# Altium PCB DPpcb_Prepared.PcbDoc
Units mm, origin at the board's own origin, x right, y up, seen from the top; angles counter-clockwise.
Board outline 142.21 x 72.14 mm, 4 copper layers (Top Layer, GND-S Layer, GND-P Layer, Bottom Layer), stack 0.603 mm thick; 62 components, 27 nets, 211 pads, 31 vias.
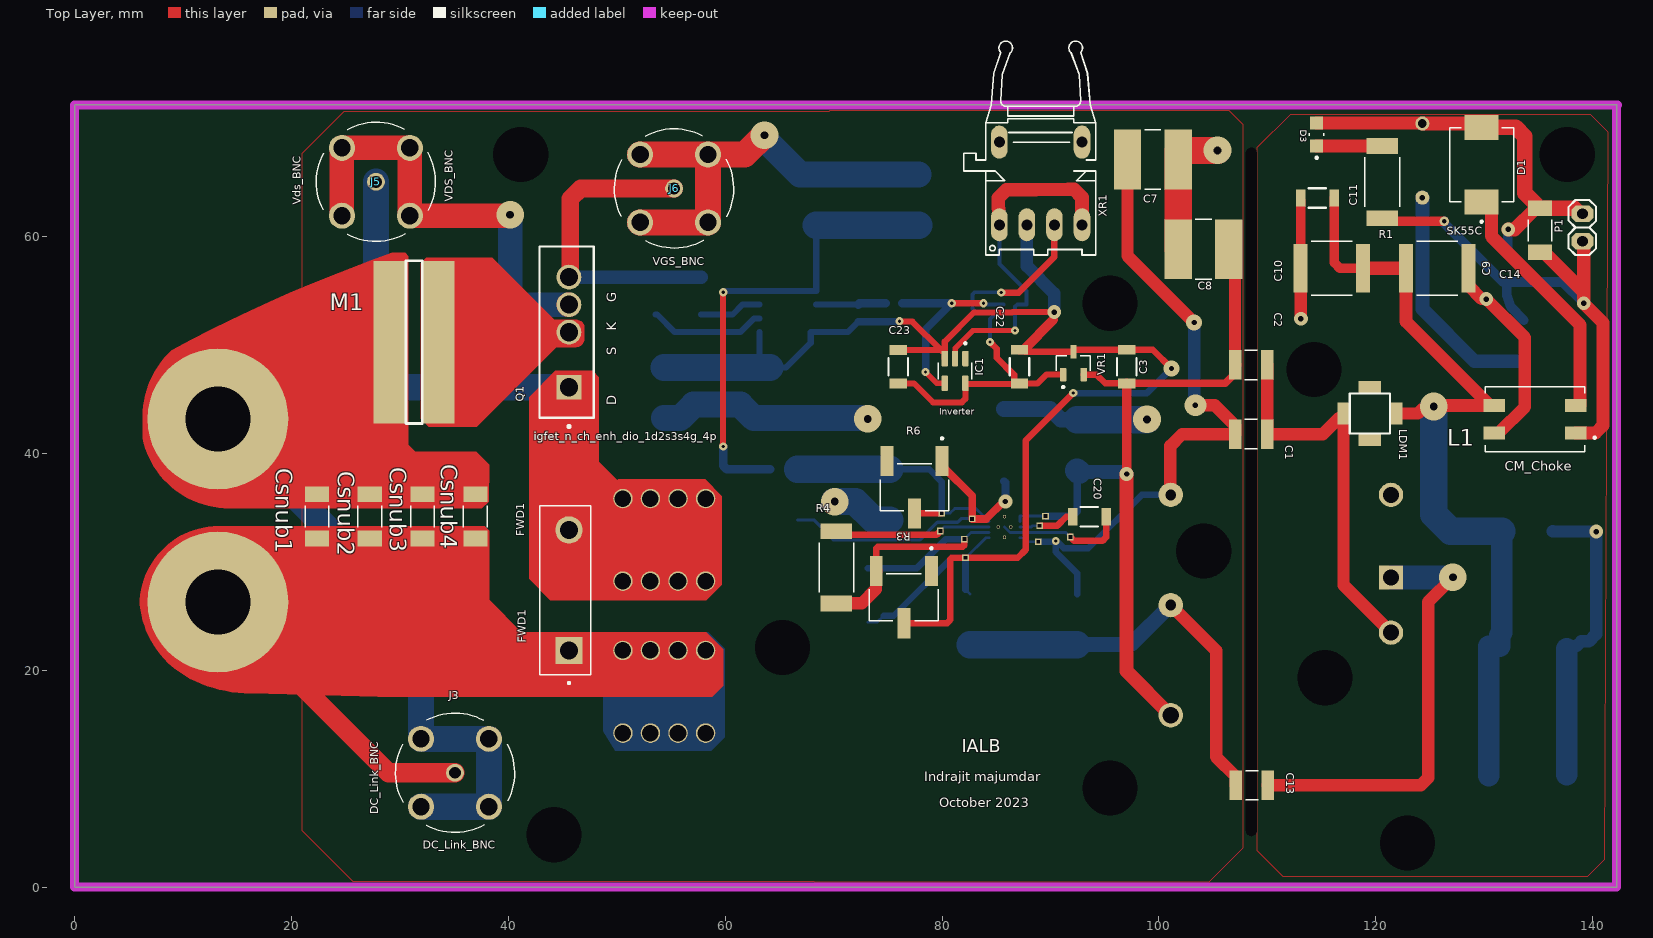
[diagram p0: Top Layer view]
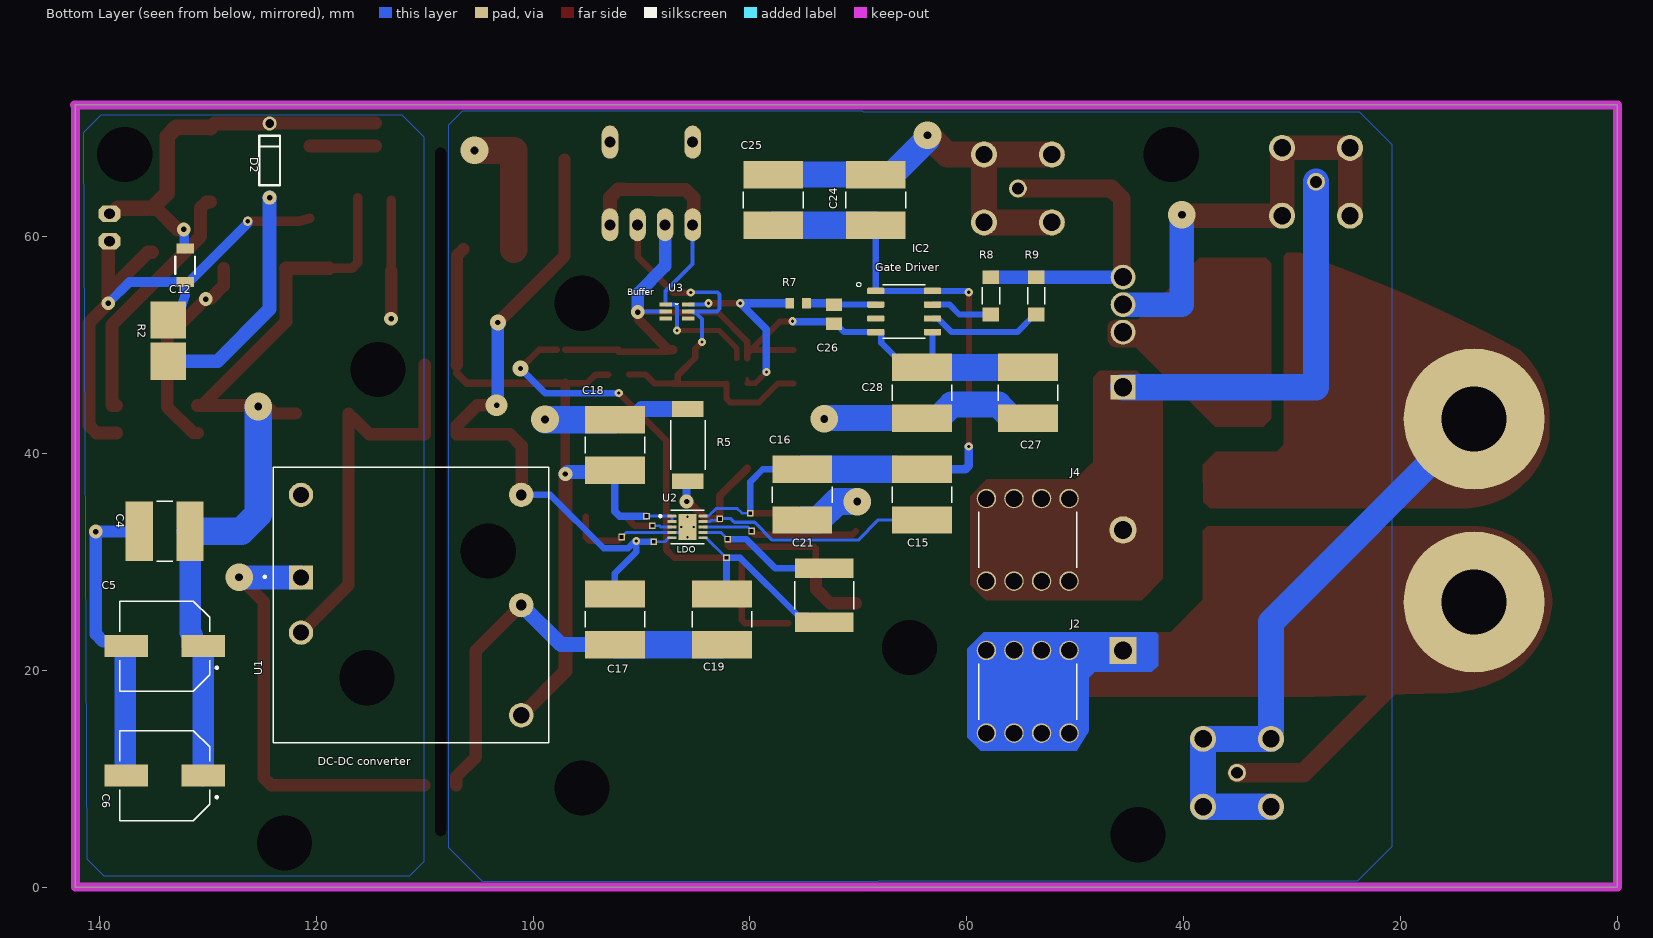
[diagram p1: Bottom Layer view, seen from below]
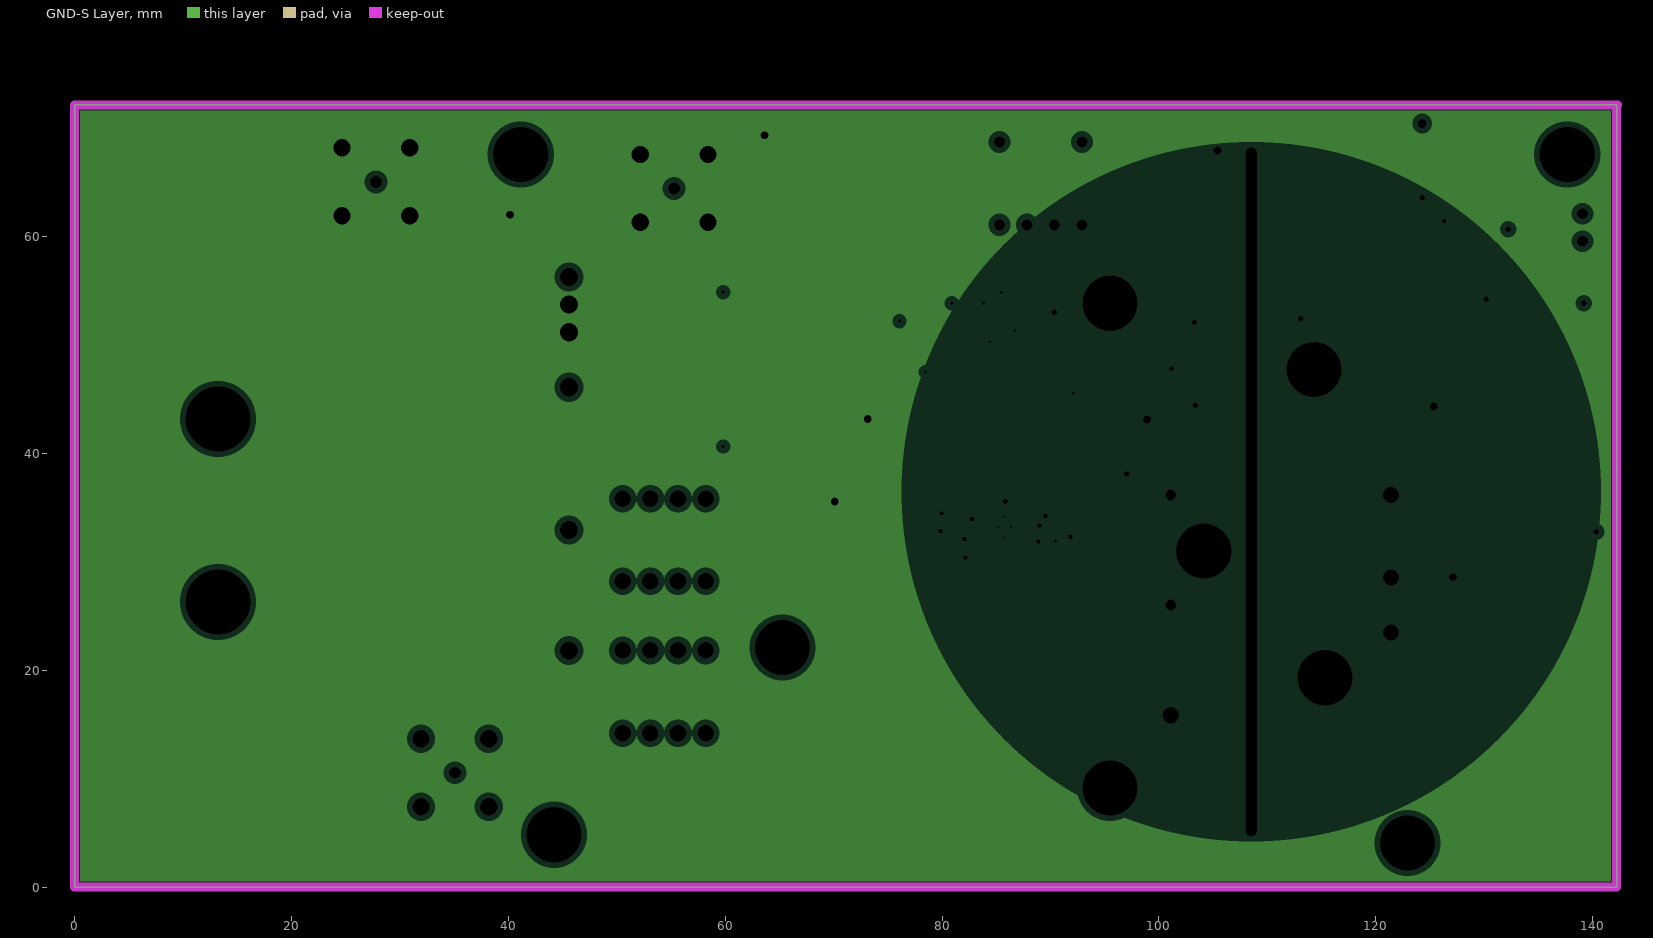
[diagram p2: GND-S Layer, clearances drawn from the general rule]
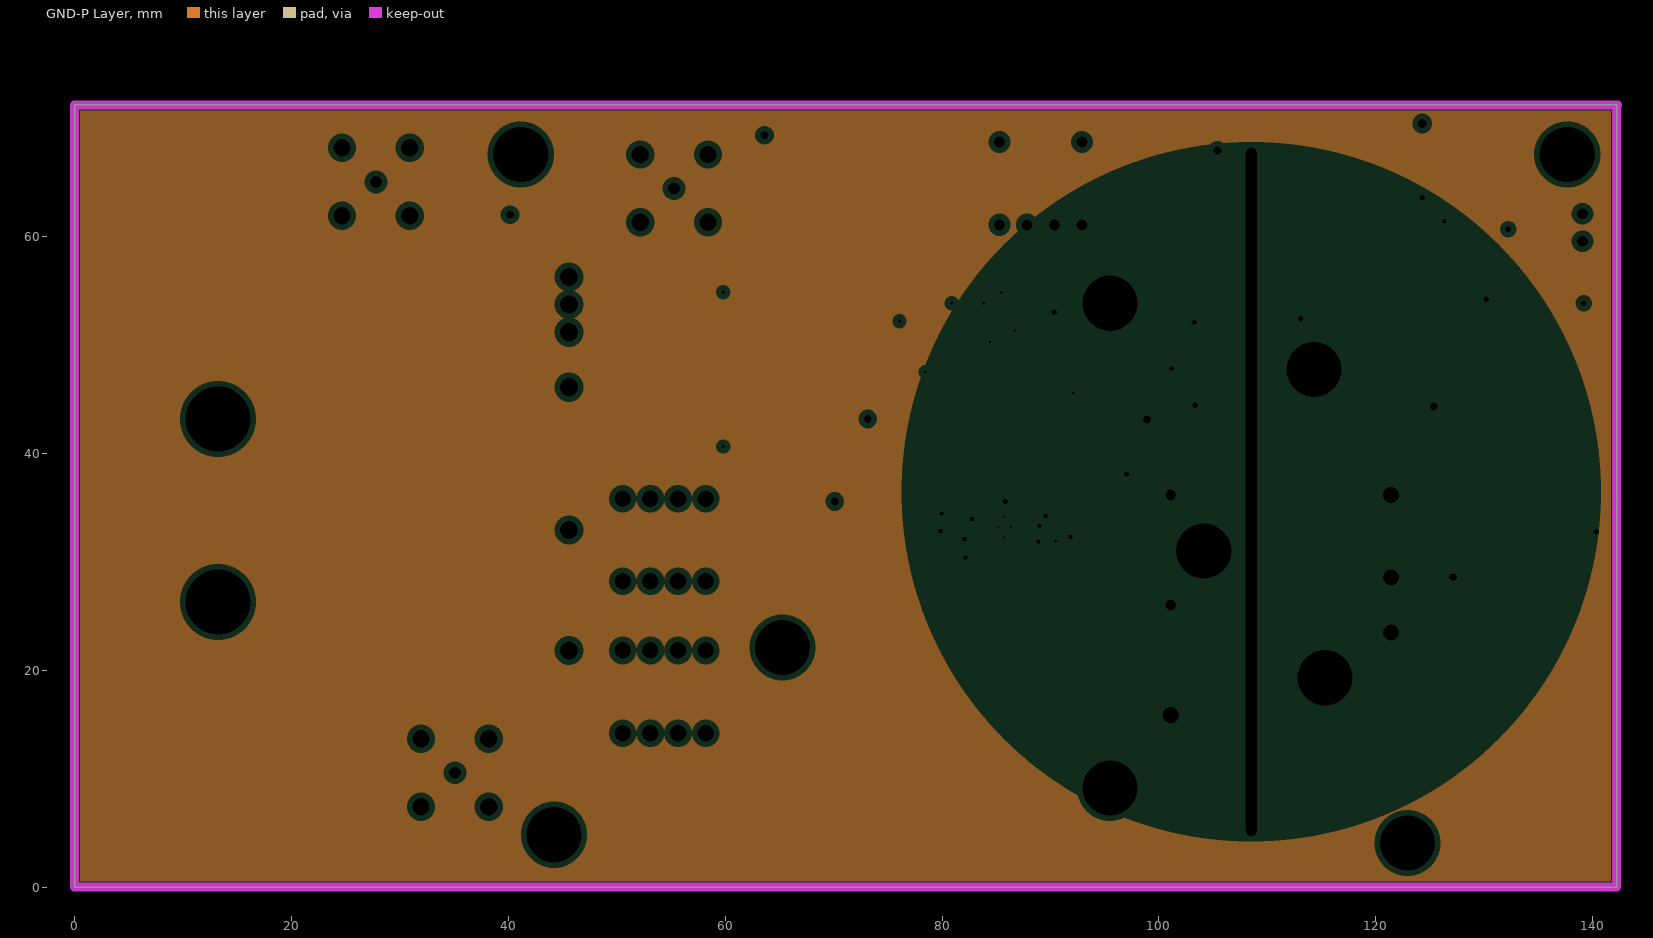
[diagram p3: GND-P Layer, clearances drawn from the general rule]

## Layer stack, top to bottom
Top Solder: solder mask 0.0102, Solder Resist, Dk 3.5
Top Layer: signal copper 0.0356
Dielectric 2: prepreg 0.0711, PP-006, Dk 4.1
GND-S Layer: plane copper 0.035, net GND-S
Dielectric 1: dielectric 0.32, FR-4, Dk 4.8
GND-P Layer: plane copper 0.035, net GND-P
Dielectric 3: prepreg 0.0711, PP-006, Dk 4.1
Bottom Layer: signal copper 0.0356
Bottom Solder: solder mask 0.0102, Solder Resist, Dk 3.5

## Board outline
0,0 0,72.136 142.215,72.136 142.215,0

## Design rules (kind name [scope] priority, off if disabled: settings)
Clearance [All] p1: gap=0.15 ignorepadtopadclearanceinfootprint=FALSE
HoleSize [All] p1: absolutevalues=TRUE maxlimit=76.2 minlimit=0.18 maxpercent=80.000 minpercent=20.000
MinimumSolderMaskSliver [All] p1: minsoldermaskwidth=0.025
PlaneClearance [All] p1: clearance=0.508
PlaneConnect [All] p1: planeconnectstyle=Direct reliefexpansion=0.508 reliefentries=4 reliefconductorwidth=0.254 reliefairgap=0.254
PolygonConnect [All] p1: connectstyle=Direct reliefconductorwidth=0.254 reliefentries=4 polygonreliefangle="90 Angle" airgapwidth=0.254
RoutingVias [All] p1: holewidth=0.711 width=1.27 viastyle="Through Hole" minholewidth=0.254 minwidth=0.203 maxholewidth=11 maxwidth=12
SilkToSilkClearance [All] p1: silktosilkclearance=0.127
SilkToSolderMaskClearance [IsPad] p1: minsilkscreentomaskgap=0.025 clearancetoexposedcopper=TRUE
SolderMaskExpansion [All] p1: expansion=0.102 istentingtop=FALSE
Width [All] p1: maxlimit=3.81 minlimit=0.254 preferedwidth=0.254
24 further rules are at their usual default settings.

## Classes and differential pairs
net class Csnub4_Nets: Supply+ Supply-
net class Csnub3_Nets: Supply+ Supply-
net class Csnub2_Nets: Supply+ Supply-
net class Csnub1_Nets: Supply+ Supply-
net class M1_Nets: GND-S NetM1_1 NetM1_2 Supply-
net class D3_Nets: +24V-IN NetD3_C
net class L1_Nets: +24V-P GND GND-P NetD1_C
net class XR1_Nets: -VEE(2-22V)-S NetC22_2 PWM-S1
net class VR1_Nets: +24V-S -VEE(2-22V)-S NetC22_2
net class U3_Nets: -VEE(2-22V)-S NetC22_2 NetU3_3 NetU3_4 PWM-S1 PWM-S2
net class R9_Nets: GATE NetIC2_6
net class R8_Nets: GATE NetIC2_7
net class R7_Nets: NetC26_2 PWM-S2
net class Q1_Nets: "FWD A" GATE GND-S
net class J6_Nets: GATE GND-S
net class J5_Nets: "FWD A" GND-S
net class J4_Nets: "FWD A"
net class J3_Nets: Supply+ Supply-
net class J2_Nets: Supply+
net class IC2_Nets: +VCC(2-22V)-S -VEE(2-22V)-S NetC26_2 NetIC2_3 NetIC2_6 NetIC2_7
net class IC1_Nets: -VEE(2-22V)-S NetC22_2 NetIC1_1 PWM-S1 PWM-S2
net class FWD1_Nets: "FWD A" Supply+
net class C28_Nets: -VEE(2-22V)-S GND-S
net class C27_Nets: -VEE(2-22V)-S GND-S
net class C26_Nets: -VEE(2-22V)-S NetC26_2
net class C25_Nets: +VCC(2-22V)-S GND-S
net class C24_Nets: +VCC(2-22V)-S GND-S
net class C23_Nets: -VEE(2-22V)-S NetC22_2
net class C22_Nets: -VEE(2-22V)-S NetC22_2
component class DP_PWM: C3 C22 C23 C24 C25 C26 C27 C28 Csnub1 Csnub2 Csnub3 Csnub4 FWD1 IC1 IC2 J2 J3 J4 J5 J6 Q1 R7 R8 R9 U3 VR1 XR1
net class U2_Nets: +24V-S +VCC(2-22V)-S -24V-S -VEE(2-22V)-S FBN GND-S NetC15_2 NetC20_2 NetR4_2
net class U1_Nets: +24V-S -24V-S GND-P GND-S NetC1_1 NetU1_6
net class R6_Nets: +VCC(2-22V)-S NetC15_2 NetR6_2
net class R5_Nets: GND-S NetC15_2
net class R4_Nets: FBN NetR4_2
net class R3_Nets: -VEE(2-22V)-S FBN NetR3_2
net class R2_Nets: GND NetD2_1
net class R1_Nets: GND NetD3_C
net class LDM1_Nets: +24V-P NetC1_1 NetLDM1_2 NetLDM1_4
net class P1_Nets: +24V-IN GND
net class D2_Nets: +24V-IN NetD2_1
net class D1_Nets: +24V-IN NetD1_C
net class C21_Nets: -VEE(2-22V)-S FBN
net class C20_Nets: GND-S NetC20_2
net class C19_Nets: -VEE(2-22V)-S GND-S
net class C18_Nets: +24V-S GND-S
net class C17_Nets: -24V-S GND-S
net class C16_Nets: +VCC(2-22V)-S GND-S
net class C15_Nets: +VCC(2-22V)-S NetC15_2
net class C14_Nets: +24V-IN GND
net class C13_Nets: GND-P GND-S
net class C12_Nets: +24V-IN GND
net class C11_Nets: +24V-P GND-P
net class C10_Nets: +24V-P GND-P
net class C9_Nets: +24V-P GND-P
net class C8_Nets: +24V-S GND-S
net class C7_Nets: -24V-S GND-S
net class C6_Nets: +24V-P GND-P
net class C5_Nets: +24V-P GND-P
net class C4_Nets: +24V-P GND-P
net class C3_Nets: +24V-S -VEE(2-22V)-S
net class C2_Nets: +24V-S NetC1_1
net class C1_Nets: -24V-S NetC1_1
component class MainSchematic: C1 C2 C4 C5 C6 C7 C8 C9 C10 C11 C12 C13 C14 C15 C16 C17 C18 C19 C20 C21 D1 D2 D3 L1 LDM1 P1 R1 R2 R3 R4 R5 R6 U1 U2

## Components (designator, comment, footprint, x,y, rotation, side; value= is the part's Value field where it differs from the comment)
C1 "C1210C102KGRACTU" CAPC3225X155N 108.509,41.783 r180 top value=1000pF
C2 "C1210C102KGRACTU" CAPC3225X155N 108.509,48.158 r180 top value=1000pF
C3 "885382208003" WCAP-CSST_885382208003 97.028,48.006 r270 top value=100nF
C4 "CKG57KX7S1H106K335JJ" CAPC6050X350N 133.985,32.817 r0 bottom value=10µF
C5 "EEEFN1H101L" CAP_EEEFN1H101L 133.985,22.23 r0 bottom value=100µF
C6 "EEEFN1H101L" CAP_EEEFN1H101L 133.985,10.287 r0 bottom value=100µF
C7 "CKG57KX7S1H106K335JJ" CAPC6050X350N 99.443,67.107 r0 top value=10µF
C8 "CKG57KX7S1H106K335JJ" CAPC6050X350N 104.115,58.826 r180 top value=10µF
C9 "C5750X7R1V476M230KC" CAP_C5750X7R1V476M230KC 125.679,57.074 r0 top value=47µF
C10 "C5750X7R1V476M230KC" CAP_C5750X7R1V476M230KC 115.951,57.074 r180 top value=47µF
C11 "885382208003" WCAP-CSST_885382208003 114.629,63.551 r0 top value=100nF
C12 "885382208003" WCAP-CSST_885382208003 132.105,57.353 r90 bottom value=100nF
C13 "C1210C102KGRACTU" CAPC3225X155N 108.585,9.398 r180 top value=1000pF
C14 "GA342QR7GF101KW01L" CAPC4520X150N 135.151,60.579 r270 top value=100pF
C15 "CKG57KX7S1H106K335JJ" CAPC6050X350N 64.135,36.195 r270 bottom value=10µF
C16 "CKG57KX7S1H106K335JJ" CAPC6050X350N 75.184,36.195 r270 bottom value=10µF
C17 "CKG57KX7S1H106K335JJ" CAPC6050X350N 92.456,24.694 r270 bottom value=10µF
C18 "CKG57KX7S1H106K335JJ" CAPC6050X350N 92.456,40.767 r90 bottom value=10µF
C19 "CKG57KX7S1H106K335JJ" CAPC6050X350N 82.575,24.694 r270 bottom value=10µF
C20 "885382208003" WCAP-CSST_885382208003 93.599,34.163 r180 top value=100nF
C21 "GR455DR73D103KW01L" CAPC5750X200N 73.152,26.924 r90 bottom value=10nF
C22 "885382208003" WCAP-CSST_885382208003 87.147,48.006 r270 top value=100nF
C23 "885382208003" WCAP-CSST_885382208003 75.971,47.995 r270 top value=100nF
C24 "CKG57KX7S1H106K335JJ" CAPC6050X350N 68.401,63.373 r90 bottom value=10µF
C25 "CKG57KX7S1H106K335JJ" CAPC6050X350N 77.851,63.373 r90 bottom value=10µF
C26 "C0805C330J5GACTU" CAPC2012X88N 72.263,52.846 r90 bottom value="33 pF"
C27 "CKG57KX7S1H106K335JJ" CAPC6050X350N 54.356,45.593 r270 bottom value=10µF
C28 "CKG57KX7S1H106K335JJ" CAPC6050X350N 64.135,45.593 r270 bottom value=10µF
Csnub1 "GA342QR7GF101KW01L" CAPC4520X150N 22.352,34.188 r90 top value=100pF
Csnub2 "GA342QR7GF101KW01L" CAPC4520X150N 27.22,34.188 r90 top value=100pF
Csnub3 "GA342QR7GF101KW01L" CAPC4520X150N 32.089,34.188 r90 top value=100pF
Csnub4 "GA342QR7GF101KW01L" CAPC4520X150N 36.957,34.188 r90 top value=100pF
D1 "SK55C" DIOM6859X262N 129.769,66.624 r90 top
D2 "BZX79C3V6" FAIR-DO-35-2 124.308,67.011 r90 bottom
D3 "Q62702P5179" LED_Q62702P5179 114.554,69.418 r90 top
FWD1 "Silicon Carbide (SiC) Schottky Diodes" DIO_FFH30S60STU 45.593,27.381 r90 top
IC1 "Single Inverter" SOT95P275X120-5N 81.204,47.601 r270 top
IC2 "Gate Driver" SOIC127P600X134-8N 65.786,53.086 r180 bottom
J2 "7460305" WE_7460305 54.381,18.011 r180 bottom
J3 "DC_Link_BNC" TE_5-1634503-1 35.077,10.541 r0 top
J4 "7460305" WE_7460305 54.381,32.025 r180 bottom
J5 "Vds_BNC" TE_5-1634503-1 27.788,65.049 r90 top
J6 "Vgs_BNC" TE_5-1634503-1 55.29,64.434 r90 top
L1 "SRF0905-100Y" IND_SRF0905-100Y 134.696,43.155 r180 top
LDM1 "SRU5028 Series - Shielded SMD Power Inductors" "Shielded SMD Power Inductors" 119.456,41.834 r90 top
M1 "M-Shunt" M-shu 32.058,57.767 r180 top
P1 "Header 2" My_1X02 139.065,59.563 r270 top
Q1 "igfet_n_ch_enh_dio_1d2s3s4g_4p" INF-PG-TO247-4-1 45.593,51.181 r90 top
R1 "ERJS1TJ103U" RES_ERJS1TJ103U 120.599,65.024 r90 top value=10k
R2 "RCP2512W1K00JEB" RESC6331X64N 133.655,50.394 r270 bottom value=1k
R3 "3269W-1-104GLF" TRIM_3269W-1-104GLF 76.479,26.746 r270 top
R4 "ERJS1TJ103U" RES_ERJS1TJ103U 70.256,29.489 r90 top value=10k
R5 "ERJS1TJ103U" RES_ERJS1TJ103U 85.725,40.767 r270 bottom value=10k
R6 "3269W-1-104GLF" TRIM_3269W-1-104GLF 77.47,36.881 r270 top
R7 "MCT0603MD1000BP100" RESC1508X55N 75.565,53.848 r180 bottom value=100Ω
R8 "ERJ8BQJ1R0V" RES_ERJ8BQJ1R0V 57.785,54.536 r90 bottom value=2Ω
R9 "ERJ8BQJ1R0V" RES_ERJ8BQJ1R0V 53.594,54.536 r90 bottom value="2 Ω"
U1 "PDQE10-Q24-D24-D" CONV_PDQE10-Q24-D24-D 111.252,26.01 r90 bottom
U2 "TPS7A3901DSCT" SON50P300X300X80-11N 85.767,33.213 r180 bottom
U3 "NC7WZ17P6X" SOT65P210X110-6N 86.741,53.086 r180 bottom
VR1 "TLV76050DBZT" SOT95P237X112-3N 92.126,48.318 r90 top
XR1 "HFBR-2521" HFBR-15X3 89.103,70.612 r180 top

## Footprints (in the part's own frame and the unit in brackets; to place one, negate y for a bottom-side part, rotate by r counter-clockwise, add the part's x,y. Pads: shape width x height; smd on the part's side, far side on the other; paste and mask are expansions set on the pad)
CAP_C5750X7R1V476M230KC [mm]
  rect 1.3x4.5 smd: 1(-2.875,0) 2(2.875,0)
  silkscreen extent -1.91,-2.5 1.91,2.5
CAP_EEEFN1H101L [mm]
  rect 4x2 smd: 1(-3.55,0) 2(3.55,0)
  silkscreen extent -4.9,-4.15 4.15,4.15, body extent -4.85,-4.15 4.85,4.15, height 10.2
CAPC2012X88N [mm]
  rect 1.16x1.47 smd: 1(-0.875,0) 2(0.875,0)
CAPC3225X155N [mm]
  rect 1.16x2.72 smd: 1(-1.475,0) 2(1.475,0)
  silkscreen extent -0.57,-1.35 0.57,1.35
CAPC4520X150N [mm]
  rect 1.45x2.22 smd: 1(-2.032,0) 2(2.032,0)
  silkscreen extent -0.99,-1.1 0.99,1.1
CAPC5750X200N [mm]
  rect 1.8x5.41 smd: 1(-2.503,0) 2(2.503,0)
  silkscreen extent -1.28,-2.7 1.28,2.7, body extent -2.85,-2.5 2.85,2.5, height 2
CAPC6050X350N [mm]
  rect 2.53x5.51 smd: 1(-2.336,0) 2(2.336,0)
  silkscreen extent -0.75,-2.75 0.75,2.75, body extent -3,-2.5 3,2.5, height 3.5
CONV_PDQE10-Q24-D24-D [mm]
  rect 2.25x2.25 hole 1.5: 1(2.54,10.16)
  round 2.25 hole 1.5: 2(-2.54,10.16) 3(-10.16,-10.16) 6(10.16,10.16)
  round 2.25 hole 1: 4(0,-10.16) 5(10.16,-10.16)
  silkscreen extent -12.7,-12.7 12.7,13.6
DIO_FFH30S60STU [mm]
  rect 2.52x2.52 / inner round 2.52 / far side rect 2.52x2.52 hole 1.68: 1(-5.56,0)
  round 2.52 hole 1.68: 2(5.56,0)
  silkscreen extent -8.66,-1.99 7.81,2.71, body extent -7.81,-1.99 7.81,2.71, height 24.75
DIOM6859X262N [mm]
  rect 2.29x3.12 smd: A(3.43,0) C(-3.43,0)
  silkscreen extent -5.35,-2.95 3.43,2.95
FAIR-DO-35-2 [mm] "TH, 2-Leads, Dia 1.91mm"
  round 1.3 hole 0.5: 1(-3.42,0)
  round 1.3 hole 0.8: 2(3.42,0)
  silkscreen extent -2.28,-0.95 2.28,0.95, body extent -3.7,-0.96 3.7,0.95, height 1.9
HFBR-15X3 [mil]
  oval 60x120 hole 40: 1(150,375) 2(50,375) 3(-50,375) 4(-150,375) 5(-150,75) 8(150,75)
  silkscreen extent -200,-292 280,485
IND_SRF0905-100Y [mm]
  rect 2x1.2 smd: 1(-3.75,1.27) 2(-3.75,-1.27) 3(3.75,-1.27) 4(3.75,1.27)
  silkscreen extent -5.6,-3 4.6,3
INF-PG-TO247-4-1 [mm] "TO247, 2.54mm pitch;4 pin, 15.8mm L X 5mm W X 25.22mm H body"
  rect 2.28x2.28 hole 1.68 paste-2539.97 mask+0: 1(-5.08,0)
  round 2.28 hole 1.68 paste-2539.97 mask+0: 2(0,0) 3(2.54,0) 4(5.08,0)
  silkscreen extent -8.82,-2.29 7.9,2.71, body extent -7.9,-2.3 7.9,2.71, height 25.12
LED_Q62702P5179 [mm]
  rect 1.2x1.2 smd: A(1.05,0) C(-1.05,0)
  silkscreen extent -2.25,-0.67 0.13,0.67, body extent -1,-0.65 1,0.65, height 0.8
M-shu [mm] "Connected to source to Source-"
  rect 3x15 smd: 1(-1.499,7.5) 2(3,7.5)
  silkscreen extent 0,0 1.5,15
My_1X02 [mil]
  oct 60x80 hole 39.37: 1(-100,0) 2(0,0)
  silkscreen extent -150,-50 50,50, body extent -150,-51 46,47, height 323
RES_ERJ8BQJ1R0V [mm]
  rect 1.25x1.5 smd: 1(-1.725,0) 2(1.725,0)
  silkscreen extent -0.78,-0.8 0.78,0.8
RES_ERJS1TJ103U [mm]
  rect 1.45x2.9 smd: 1(-3.325,0) 2(3.325,0)
  silkscreen extent -2.28,-1.6 2.28,1.6
RESC1508X55N [mm]
  rect 0.81x0.98 smd: 1(-0.771,0) 2(0.771,0)
RESC6331X64N [mm]
  rect 3.42x3.3 smd: 1(-1.894,0) 2(1.894,0)
"Shielded SMD Power Inductors" [mm]
  rect 2.05x1.15 smd: 1(1.85,-2.425) 3(1.85,2.425)
  rect 1.15x2.05 smd: 2(4.275,0) 4(-0.575,0)
  silkscreen extent 0,-1.85 3.7,1.85
SOIC127P600X134-8N [mm]
  rrect25% 1.57x0.58 smd: 1(-2.615,1.905) 2(-2.615,0.635) 3(-2.615,-0.635) 4(-2.615,-1.905) 5(2.615,-1.905) 6(2.615,-0.635) 7(2.615,0.635) 8(2.615,1.905)
  silkscreen extent -4.39,-2.46 1.97,2.68
SON50P300X300X80-11N [mm]
  rrect50% 0.86x0.26 smd: 1(-1.435,1) 2(-1.435,0.5) 3(-1.435,0) 4(-1.435,-0.5) 5(-1.435,-1) 6(1.435,-1) 7(1.435,-0.5) 8(1.435,0) 9(1.435,0.5) 10(1.435,1)
  rect 1.65x2.4 smd paste-2: 11(0,0)
  round 0.3 hole 0.2: 11_1(0,0.95) 11_2(-0.575,0) 11_3(0.575,0) 11_4(0,-0.95)
  silkscreen extent -2.6,-1.55 1.55,1.55
SOT65P210X110-6N [mil]
  rect 46x14 smd: 1(-41,26) 2(-41,0) 3(-41,-26) 4(41,-26) 5(41,0) 6(41,26)
  silkscreen extent -5,27 5,28
SOT95P237X112-3N [mm]
  rrect25% 1.24x0.59 smd: 1(-1.055,0.95) 2(-1.055,-0.95) 3(1.055,0)
  silkscreen extent -2.3,-1.57 0.7,1.57
SOT95P275X120-5N [mm]
  rrect25% 1.42x0.58 smd: 1(-1.145,0.95) 2(-1.145,0) 3(-1.145,-0.95) 4(1.145,-0.95) 5(1.145,0.95)
  silkscreen extent -2.64,-1.56 0.75,1.56, body extent -1.34,-1.5 1.41,1.5, height 1.1
TE_5-1634503-1 [mm]
  round 1.65 hole 1.1: 1(0,0)
  round 2.4 hole 1.6: 2(-3.13,3.13) 3(3.13,3.13) 4(3.13,-3.13) 5(-3.13,-3.13)
  silkscreen extent -5.49,-5.49 5.5,5.51
TRIM_3269W-1-104GLF [mm]
  rect 2.79x1.19 smd: 1(-2.415,2.54) 2(2.415,0) 3(-2.415,-2.54)
  silkscreen extent -4.6,-3.17 2.16,3.18, body extent -3.18,-3.18 3.18,3.18, height 8.46
WCAP-CSST_885382208003 [mm]
  rect 0.9x1.6 smd: 1(-1.55,0) 2(1.55,0)
  silkscreen extent -0.8,-0.9 0.8,0.9, body extent -1.6,-0.8 1.6,0.8, height 0.63
WE_7460305 [mm]
  round 1.8 hole 1.525: 1(-3.81,3.81) 2(-1.27,3.81) 3(1.27,3.81) 4(3.81,3.81) 5(3.81,-3.81) 6(1.27,-3.81) 7(-1.27,-3.81) 8(-3.81,-3.81)
  silkscreen extent -4.5,-2.59 4.5,2.59

## Part data
C1 C2 C13: "Capacitor;Ceramic;Cap;1000pF;Tol+10%;SMT;Vol-Rtg 2000V;High Voltage;TR", Package=None, Availability=Unavailable, MP=C1210C102KGRACTU, Price=None
C3 C11 C12 C20 C22 C23: "WCAP-CSST Soft Termination MLCC; SMT 1206; X7R; 100nF 10%; 50V; -55C to +125C; Tech. PN X7R1206104K050DFCT1S000", Package="1206 Wurth Electronics", Availability=Warning, Check_prices=https://www.snapeda.com/parts/885382208003/Wurth%20Electronics%20Inc/view-part/4217540/?ref=eda, MF="Wurth Electronics Inc", MP=885382208003, Price=None, SnapEDA_Link=https://www.snapeda.com/parts/885382208003/Wurth%20Electronics%20Inc/view-part/4217540/?ref=snap
C4 C7 C8 C15 C16 C17 C18 C19 C24 C25 C27 C28: "10 ÂµF Â±10% 50V Ceramic Capacitor X7S SMD, J-Lead", Package="6050 TDK", Check_prices=https://www.snapeda.com/parts/CKG57KX7S1H106K335JJ/TDK/view-part/?ref=eda, Digi-Key_Part_Number=445-10463-2-ND, MF=TDK, MP=CKG57KX7S1H106K335JJ, Purchase-URL=https://pricing.snapeda.com/search/part/CKG57KX7S1H106K335JJ/?ref=eda, SnapEDA_Link=https://www.snapeda.com/parts/CKG57KX7S1H106K335JJ/TDK/view-part/?ref=snap
C5 C6: "CAP ALUM 100UF 20% 50V SMD", Package="RADIAL-2 Panasonic", Availability="In Stock", Check_prices=https://www.snapeda.com/parts/EEE-FN1H101L/Panasonic/view-part/6178263/?ref=eda, MF="Panasonic Electronic Components", MP=EEE-FN1H101L, Price=None, Purchase-URL=https://pricing.snapeda.com/search/part/EEE-FN1H101L/?ref=eda, SnapEDA_Link=https://www.snapeda.com/parts/EEE-FN1H101L/Panasonic/view-part/6178263/?ref=snap
C9 C10: "47 ÂµF Â±20% 35V Ceramic Capacitor X7R 2220 (5750 Metric)", Package=None, Check_prices=https://www.snapeda.com/parts/C5750X7R1V476M230KC/TDK/view-part/?ref=eda, MF="TDK Corporation", MP=C5750X7R1V476M230KC, SnapEDA_Link=https://www.snapeda.com/parts/C5750X7R1V476M230KC/TDK/view-part/?ref=snap
C14 Csnub1 Csnub2 Csnub3 Csnub4: "Cap Ceramic Suppression Y2 100pF 250VAC X7R 10% SMD 1808 125C T/R", Package=None, Availability=Unavailable, MP=GA342QR7GF101KW01L, Price=None
C21: "2220 10 nF 2 kV Â±10% Tolerance X7R SMT Multilayer Ceramic Capacitor", Package="5750 Murata", Availability=Warning, Check_prices=https://www.snapeda.com/parts/GR455DR73D103KW01L/Murata%20Electronics%20North%20America/view-part/78913/?ref=eda, MF="Murata Electronics", MP=GR455DR73D103KW01L, Price=None, Purchase-URL=https://pricing.snapeda.com/search/part/GR455DR73D103KW01L/?ref=eda, SnapEDA_Link=https://www.snapeda.com/parts/GR455DR73D103KW01L/Murata%20Electronics%20North%20America/view-part/78913/?ref=snap
C26: "33pF Â±5% 50V Ceramic Capacitor C0G, NP0 0805 _2012 Metric_", Package="2012 KEMET", Digi-Key_Part_Number=399-1115-1-ND, Digi-Key_Purchase_URL=https://www.digikey.com/product-detail/en/kemet/C0805C330J5GACTU/399-1115-1-ND/411390?utm_source=snapeda&utm_medium=aggregator&utm_campaign=symbol, MF=KEMET, MP=C0805C330J5GACTU, SnapEDA_Link=https://www.snapeda.com/parts/C0805C330J5GACTU/KEMET/view-part/609597/?ref=snap
D1 L1 R1 R2 R4 R5 R7 R8 R9 U1: Package=None, Availability=Unavailable, Price=None
  D1: MP=SK55C
  L1: MF="{'manufacturer': u'Bourns'}", MP=SRF0905-100Y
  R1 R4 R5: MP=ERJS1TJ103U
  R2: MP=RCP2512W1K00JEB
  R7: MP=MCT0603MD1000BP100
  R8 R9: MP=ERJ8BQJ1R0V
  U1: MP=PDQE10-Q24-D24-D
D2: library part CMP-004-00021-2, "Zener Diode, 3.6 V, 5 mA, -65 to 200 degC, 2-Pin DO-35, RoHS, Bulk", Case/Package=DO-35-2, Forward Voltage=1.5V, Manufacturer="Fairchild Semiconductor", Max Operating Temperature=200°C, Min Operating Temperature=-65°C, Package Description="2-Pin Through Hole Diode, Dia 1.72 mm, Body Length 3.805 mm", Package Quantity=1000, Power=500mW, Tolerance=6%, Datasheet URL=https://www.fairchildsemi.com/datasheets/BZ/BZX79C3V6.pdf, Datasheet Version="Rev. C1, 07/2007", Impedance=90Ohm, Manufacturer URL=https://www.fairchildsemi.com/, Mounting Technology=TH, Package Reference=DO-35-2, Package URL=https://www.fairchildsemi.com/package-drawings/DO/DO35A.pdf, Packaging=Bulk, Pins=2, RoHS Compliant=True
D3: "LED Uni-Color Green 572nm 2-Pin SMD T/R", Package="0805 Osram Opto", Check_prices=https://www.snapeda.com/parts/Q62702P5179/Osram+Opto/view-part/?ref=eda, MF="Osram Opto", MP=Q62702P5179, SnapEDA_Link=https://www.snapeda.com/parts/Q62702P5179/Osram+Opto/view-part/?ref=snap
FWD1: library part TO−247−2LD, "Silicon Carbide (SiC) Schottky Diodes use a completely new / technology that provides superior switching performance and higher / reliability compared to Silicon. No reverse recovery current, / temperature independent switching characteristics, and excellent / thermal performance sets Silicon Carbide as the next generation of / power semiconductor. System benefits include highest efficiency, / faster operating frequency, increased power density, reduced EMI, and / reduced system size and cost."
IC1: library part MC74VHC1G05DTT1G, "The MC74VHC1G05 / MC74VHC1GT05 is a single inverter with / open drain output in tiny footprint packages. / The input structures provide protection when voltages up to 5.5 V / are applied, regardless of the supply voltage. This allows the device to / be used to interface 5 V circuits to 3 V circuits. The output structures / also provide protection when VCC = 0 V and when the output voltage / exceeds VCC. These input and output structures help prevent device / destruction caused by supply voltage − input/output voltage mismatch, / battery backup, hot insertion, etc.", ComponentLink1Description="Datasheet Link", ComponentLink1URL=https://www.snapeda.com/parts/MC74VHC1G05DTT1G/ON%20Semiconductor/datasheet/, Design Item ID=MC74VHC1G05DTT1G
IC2: library part IXDI609SIA, "The IXDD609/IXDI609/IXDN609 high-speed gate / drivers are especially well suited for driving the latest / IXYS MOSFETs and IGBTs. The IXD_609 / high-current output can source and sink 9A of peak / current while producing voltage rise and fall times of / less than 25ns. The input is CMOS compatible, and is / virtually immune to latch up. Proprietary circuitry / eliminates cross-conduction and current / “shoot-through.” Low propagation delay and fast, / matched rise and fall times make the IXD_609 family / ideal for high-frequency and high-power applications. / The IXDD609 is configured as a non-inverting driver / with an enable, the IXDN609 is configured as a / non-inverting driver, and the IXDI609 is configured as / an inverting driver. / The IXD_609 family is available in a standard 8-pin / DIP (PI); an 8-pin SOIC (SIA); an 8-pin Power SOIC / with an exposed metal back (SI); an 8-pin DFN (D2); a / 5-pin TO-263 (YI); and a 5-pin TO-220 (CI).", ComponentLink1Description="Datasheet link", ComponentLink1URL=https://www.snapeda.com/parts/IXDI609SIA/IXYS/datasheet/, ID=IXDI609SIA
J2 J4: "8 Pin Screw Terminal, Power Tap M5 Through Hole", Package=None, Availability="In Stock", Check_prices=https://www.snapeda.com/parts/7460305/Wurth+Electronics+Inc./view-part/?ref=eda, MF="Wurth Electronics", MP=7460305, Price=None, Purchase-URL=https://pricing.snapeda.com/search/part/7460305/?ref=eda, SnapEDA_Link=https://www.snapeda.com/parts/7460305/Wurth+Electronics+Inc./view-part/?ref=snap
J3 J5 J6: library part 5-1634503-1, "Rf / Coaxial Connector, Bnc Coaxial, Straight Jack, Solder, 50 Ohm, Brass", Package=None, Availability=Unavailable, EU_RoHS_Compliance=Compliant, MF="TE Connectivity", MP=5-1634503-1, Number_of_Positions=1, Price=None, SnapEDA_Link=https://www.snapeda.com/parts/5-1634503-1/TE%20Connectivity%20AMP%20Connectors/view-part/441267/?ref=snap, TE_purchase_URL=https://www.te.com/usa-en/product-5-1634503-1.html?te_bu=Cor&te_type=disp&te_campaign=seda_glo_cor-seda-global-disp-prtnr-fy19-seda-model-bom-cta_sma-317_1&elqCampaignId=32493
LDM1: library part SRU5028-4R7Y, "Test Voltage ....................................0.1 V / .. 230 °C, 50 sec. max. / Operating Temp. .........-40 °C to +125 °C / (Temperature rise included) / Storage Temp. ............-40 °C to +125 °C / Resistance to Soldering Heat / ............................... 260 °C for 10 sec. / Moisture Sensitivity Level ...................... 1 / .................. N/A", Inductance at 100kHz=4.7µH, ComponentLink1Description="Data Sheet", ComponentLink1URL=https://www.snapeda.com/parts/SRU5028-470Y/Bourns/datasheet/
P1: "Header, 2-Pin", ASiD Part Number="Header 2-AS"
Q1: "Insulated-Gate Field-Effect Transistor (IGFET), N-Channel, Enhancement, Body Diode, Pin 1 Drain, 2 Source, 3 Source, 4 Gate, 4 Pins", Name=TO247-4, Symbol type="Insulated-Gate Field-Effect Transistor (IGFET), N-Channel, Enhancement, Body Diode, Pin 1 Drain, 2 Source, 3 Source, 4 Gate, 4 Pins"
R3 R6: "1/4 Sq, SMD, TRIMMER, Cermet, 12 Turns, 100 Kilohms", Package="SMD-3 Bourns", Check_prices=https://www.snapeda.com/parts/3269W-1-104GLF/Bourns/view-part/?ref=eda, MF=Bourns, MP=3269W-1-104GLF, SnapEDA_Link=https://www.snapeda.com/parts/3269W-1-104GLF/Bourns/view-part/?ref=snap
U2: "Linear Voltage Regulator IC 2 Output 150mA 10-WSON _3x3_", Package="WSON-10 Texas Instruments", Availability=Unavailable, MF="Texas Instruments", MP=TPS7A3901DSCT, Price=None, SnapEDA_Link=https://www.snapeda.com/parts/TPS7A3901DSCT/Texas%20Instruments/view-part/1438812/?ref=snap
U3: "Buffer, Non-Inverting 2 Element 1 Bit per Element Push-Pull Output SC-88 _SC-70-6_", Package="SC-70-6 Fairchild Semiconductor", Availability=Unavailable, MF="ON Semiconductor", MP=NC7WZ17P6X, Name="Non-Inverting Buffer", Price=None, SnapEDA_Link=https://www.snapeda.com/parts/NC7WZ17P6X/ON%20Semiconductor/view-part/48208/?ref=snap
VR1: "Linear Voltage Regulator IC 1 Output 100mA SOT-23-3", Package="SOT-23-3 Texas Instruments", Availability=Unavailable, MF="Texas Instruments", MP=TLV76050DBZT, Price=None, SnapEDA_Link=https://www.snapeda.com/parts/TLV76050DBZT/Texas%20Instruments/view-part/2482722/?ref=snap
XR1: "Fiber Optic Receiver 5MBd -43dBm 4.75V ~ 5.25V 10mA", Package=None, Availability=Unavailable, MF="Broadcom / Avago", MP=HFBR-2521, Price=None, SnapEDA_Link=https://www.snapeda.com/parts/HFBR-2521/Avago/view-part/4258202/?ref=snap

## Free pads (board coordinates)
  round 0 hole 5.08 unplated paste-2539.97: 2(41.148,67.564) 2(44.196,4.826) 2(65.303,22.098) 2(95.504,9.144) 2(95.504,53.848) 2(104.14,30.988) 2(114.3,47.752) 2(115.316,19.304) 2(122.936,4.064) 2(137.668,67.564)
  rect 0.61x0.61 / inner rect 0.61x0.152 / far side rect 0.61x0.61 hole 0.3 square: 3(79.856,32.839) 3(79.985,34.483) 3(82.067,32.096) 3(82.168,30.375) 3(82.779,33.96) 3(88.875,31.852) 3(89.002,33.325) 3(89.551,34.213) 3(91.846,32.283)
  round 0 hole 1.016 slot 63.5 at 90 deg: 5(108.534,36.449)
  rrect50% 0x0 all layers, no hole: 6(94.158,47.32)
  round 13 hole 6: ""(13.208,26.289) ""(13.208,43.18)

## Via types
v1: diameter 0.762, hole 0.3, Top Layer to Bottom Layer, 10 vias
v2: diameter 2.54, hole 0.711, Top Layer to Bottom Layer, 8 vias
v3: diameter 1.27, hole 0.5, Top Layer to Bottom Layer, 7 vias
v4: diameter 1.5, hole 0.5, Top Layer to Bottom Layer, 2 vias
v5: diameter 0.711, hole 0.3, Top Layer to Bottom Layer, 1 vias
v6: diameter 0.889, hole 0.4, Top Layer to Bottom Layer, 1 vias
v7: diameter 2, hole 0.508, Top Layer to Bottom Layer, 1 vias
v8: diameter 1.27, hole 0.508, Top Layer to Bottom Layer, 1 vias

## Nets (pads, with @x,y where several pads share a name; then routed paths per layer and width w, separated by ;. In a path a pad name is that pad's centre, name@x,y a point inside that pad or via, vN(x,y) a via of type N, cw(c..) or ccw(c..) an arc to the next point about the centre after c; other vN are vias at no path point)
+24V-IN: C12.2 C14.1 D1.A D2.2 D3.A P1.1 | length 36.1
  Top Layer w1.194: D3.A 124.242,70.468 124.279,70.431 D2.2
  Top Layer w1.27: D2.2 124.313,70.425 129.398,70.425 D1.A ; v3(132.232,60.655) 132.81,60.655 C14.1@134.766,62.611
  Top Layer w1.448: D1.A 129.793,70.079 132.908,70.079 133.756,69.23 133.756,64.006 134.765,62.997 134.765,62.612 134.766,62.611 C14.1 ; C14.1@135.585,62.611 138.303,62.611 138.811,62.103 P1.1
  Bottom Layer w0.889: C12.2 132.163,58.903 132.169,58.909 132.169,60.592 v3(132.232,60.655) v3@132.258,60.681
+24V-P: C4.1 C5.1 C6.1 C9.1 C10.1 C11.2 L1.3 LDM1.1 | length 78.5
  Top Layer w0.889: C11.2 116.179,57.595 116.7,57.074 C10.1
  Top Layer w1.143: LDM1.1 123.897,43.684 124.269,44.056 125.082,44.056 v2(125.349,44.323)
  Top Layer w1.194: C9.1 122.804,52.167 L1.3@130.546,44.425 ; v2(125.349,44.323) 125.447,44.421 130.543,44.421 L1.3@130.546,44.425 ; L1.3 L1.3@130.546,44.425
  Top Layer w1.27: C10.1 C9.1
  Bottom Layer w1.981: C6.1 C5.1 131.435,22.23 131.444,22.24 131.444,23.24 131.649,23.444 C4.1
  Bottom Layer w2.515: v2(125.349,44.323) 125.349,34.373 126.905,32.817 C4.1
+24V-S: C2.2 C3.2 C8.1 C18.1 pad.3@89.551,34.213 U1.3 U2.1 U2.2 VR1.2 | length 73.1
  Top Layer w0.584: VR1.2 94.247,47.263 95.054,46.456 C3.2 ; C2.2@107.034,47.378 C2.2
  Top Layer w0.7: C3.2 106.111,46.456 C2.2@107.034,47.378
  Top Layer w0.889: v3(97.028,38.1) C3.2
  Top Layer w1.143: C8.1 107.025,58.252 107.025,48.167 C2.2
  Top Layer w1.27: v3(97.028,38.1) 97.028,19.914 U1.3
  Bottom Layer w0.254: U2.2 U2.1 pad.3@89.551,34.213
  Bottom Layer w0.7: pad.3@89.551,34.213 91.998,34.213 92.456,34.671 C18.1
  Bottom Layer w1.27: C18.1@92.603,38.284 96.844,38.284 v3(97.028,38.1)
  Bottom Layer w2.235: C18.1 C18.1@92.603,38.284
+VCC(2-22V)-S: C15.1 C16.1 C24.1 C25.1 IC2.1 IC2.8 pad.3@79.985,34.483 R6.2 U2.10 | length 68.6
  Top Layer w0.254: R6.2 R6.2@77.488,34.483
  Top Layer w0.559: v1@59.69,40.64 59.69,40.695 59.817,40.822 v1(59.817,54.864)
  Top Layer w0.6: R6.2@77.488,34.483 pad.3@79.985,34.483
  Bottom Layer w0.254: pad.3@80.035,34.483 80.75,34.483 81.182,34.915 83.115,34.915 83.817,34.213 U2.10
  Bottom Layer w0.559: v1(59.817,54.864) 59.872,54.864 59.999,54.991 IC2.8 IC2.1 C24.1
  Bottom Layer w0.6: C16.1 78.817,38.531 79.985,37.363 pad.3@79.985,34.483
  Bottom Layer w0.8: v1(59.817,40.64) 59.817,38.858 60.144,38.531 C15.1
  Bottom Layer w2.515: C15.1@66.675,38.531 C16.1 ; C24.1 C25.1
-24V-S: C1.2 C7.1 C17.1 pad.3@88.875,31.852 U1.5 U2.5 | length 63.5
  Top Layer w1.143: C7.1 97.107,58.214 v4(103.251,52.07) ; U1.5 101.067,36.195 101.067,40.691 102.159,41.783 C1.2 107.034,42.563 105.147,44.45 v7(103.378,44.45)
  Bottom Layer w0.254: U2.5 87.502,32.213 87.63,32.085 87.63,32.08 87.859,31.852 pad.3@88.875,31.852 ; v5(90.5,31.928) v5@90.556,31.928
  Bottom Layer w0.6: pad.3@88.875,31.852 90.394,31.852 90.47,31.928 v5(90.5,31.928) 90.5,30.912 92.456,28.956 C17.1 ; v5@90.556,31.928 91.245,31.239 93.495,31.239 98.426,36.17 U1.5
  Bottom Layer w1.143: v4(103.251,52.07) 103.251,44.577 v7(103.378,44.45)
-VEE(2-22V)-S: C3.1 C19.1 C21.1 C22.1 C23.1 C26.1 C27.1 C28.1 IC1.3 IC2.4 IC2.5 pad.3@82.168,30.375 R3.2 U2.6 U3.2 VR1.3 XR1.2 | length 141.1
  Top Layer w0.559: C23.1 79.875,49.545 ; v1(76.073,52.197) 76.112,52.158 77.262,52.158 79.875,49.545 ; IC1.3 IC1.3@80.254,49.166 ; v3(90.348,53.035) 86.501,53.035 86.457,52.992 82.938,52.992 80.254,50.307 IC1.3@80.254,49.166 ; 79.875,49.545 IC1.3@80.254,49.166
  Top Layer w0.584: C22.1@87.497,49.556 87.681,49.373 VR1.3 92.126,49.553 92.129,49.556 C3.1
  Top Layer w0.6: R3.2 80.465,24.331 80.772,24.638 80.772,30.226 80.921,30.375 82.168,30.375 86.992,30.375 87.706,31.09 87.706,41.173 v1(92.1,45.568) ; 97.841,49.555 99.441,49.555 v4(101.168,47.828)
  Top Layer w0.889: C22.1 87.497,49.556 90.275,52.334
  Bottom Layer w0.254: C21.1 74.014,24.421 C21.1@74.609,25.016 ; C19.1@82.168,27.437 C19.1 ; pad.3@82.18,30.362 84.032,32.213 U2.6
  Bottom Layer w0.356: U3.2 90.297,53.086 v3(90.348,53.035)
  Bottom Layer w0.559: IC2.5 63.171,48.893 C28.1 65.625,47.929 67.895,50.199 67.895,51.17 67.906,51.181 IC2.4 71.318,51.181 C26.1@72.295,52.158 ; v1@76.034,52.158 v1(76.073,52.197)
  Bottom Layer w0.6: C21.1@74.609,25.016 75.552,25.016 80.911,30.375 82.168,30.375 C19.1@82.168,27.437 ; v1(92.1,45.568) 98.908,45.568 v4(101.168,47.828)
  Bottom Layer w0.7: C26.1@72.295,52.158 v1@76.034,52.158
  Bottom Layer w1.143: XR1.2 87.833,57.277 90.348,54.762 v3(90.348,53.035)
  Bottom Layer w2.515: C27.1 C28.1
FBN: C21.2 pad.3@82.067,32.096 R3.3 R4.1 U2.7 | length 29.3
  Top Layer w0.6: R3.3 73.939,31.246 74.088,31.394 81.919,31.394 82.067,31.543 pad.3@82.067,32.096
  Top Layer w1.143: R4.1 72.596,26.164 73.916,27.485 73.916,29.138 R3.3
  Bottom Layer w0.254: pad.3@82.067,32.096 82.685,32.713 U2.7
  Bottom Layer w0.6: C21.2 77.69,29.427 80.359,32.096 pad.3@82.067,32.096
"FWD A": FWD1.2 J4.1 J4.2 J4.3 J4.4 J4.5 J4.6 J4.7 J4.8 J5.1 Q1.1 | length 36.8
  Top Layer w2.261: Q1.1 Q1.1@45.6,46.094
  Bottom Layer w2.413: J5.1 27.788,46.101 Q1.1
GATE: J6.1 Q1.4 R8.2 R9.2 | length 29.5
  Top Layer w1.626: Q1.4 45.718,56.386 45.718,63.477 46.67,64.429 55.285,64.429 J6.1
  Bottom Layer w1.245: Q1.4 R9.2 R8.2 ; J6.1@55.245,64.516 55.29,64.471 J6.1
GND: C12.1 C14.2 L1.1 P1.2 R1.1 R2.1 | length 52.1
  Top Layer w0.889: R1.1 121.605,61.419 v6(126.34,61.417)
  Top Layer w1.194: L1.1 140.271,41.885 140.97,42.584 140.97,52.049 139.192,53.827 v3(139.192,53.848)
  Top Layer w1.27: C14.2 135.536,58.547 139.192,54.891 ; P1.2 139.192,59.436 139.192,54.891 ; v3(139.192,53.848) 139.192,54.891
  Bottom Layer w0.889: v6(126.34,61.417) 126.34,61.219 131.755,55.803 C12.1 ; R2.1 132.449,53.553 132.105,54.546 132.105,55.798 C12.1 ; v3(139.192,53.848) 137.237,55.803 C12.1
GND-P: C4.2 C5.2 C6.2 C9.2 C10.2 C11.1 C13.1 L1.4 U1.1 | length 98.6
  Top Layer w0.889: C10.2@113.078,56.821 C11.1@113.078,63.322
  Top Layer w1.143: C13.1 124.171,9.398 124.841,10.068 124.841,26.289 v2(127.127,28.575) ; C10.2@113.078,56.821 113.091,56.808 v8@113.091,52.426 ; C9.2 128.554,55.474 129.775,54.253 130.176,54.253 v3(130.2,54.229) 133.756,50.673 133.756,44.295 131.346,41.885 L1.4
  Bottom Layer w1.143: C4.2 136.346,32.791 v3(140.335,32.791) 140.335,23.328 139.665,22.659 138.964,22.659 138.535,22.23 C5.2 ; C6.2 C6.2@137.617,10.369
  Bottom Layer w1.981: C6.2@137.617,10.369 C5.2@137.617,21.971
  Bottom Layer w2.235: U1.1 121.425,28.562 127.114,28.562 v2(127.127,28.575)
  other v8: 113.106,52.426
GND-S: C7.2 C8.2 C13.2 C16.2 C17.2 C18.2 C19.2 C20.1 C24.2 C25.2 C27.2 C28.2 J5.2 J5.3 J5.4 J5.5 J6.2 J6.3 J6.4 J6.5 M1.1 pad.3@91.846,32.283 Q1.2 Q1.3 R5.1 U1.4 U2.4 U2.11 U2.11_1 U2.11_2 U2.11_3 U2.11_4 | length 185.5
  Top Layer w0.61: pad.3@91.846,32.283 92.202,31.928 94.792,31.928 95.149,32.285 C20.1
  Top Layer w1.143: U1.4 105.283,21.819 105.283,12.005 107.11,10.178 C13.2
  Top Layer w2.261: J5.2 J5.3 J5.4 J5.5 40,61.919 40.082,62.001 v2(40.157,62.001) ; M1.1@33.556,49.886 M1.1@33.582,49.86 ; Q1.2@45.589,51.185 Q1.2 ; Q1.3@45.589,53.725 Q1.3
  Top Layer w2.388: J6.2 J6.5 J6.4 ; J6.3 J6.4 ; v2(63.627,69.342) 63.586,69.342 61.81,67.566 58.422,67.566 J6.4
  Top Layer w2.515: C8.2 C7.2 101.779,67.932 101.786,67.94 105.405,67.94 v2(105.41,67.945)
  Bottom Layer w0.254: U2.11 86.267,32.713 U2.4 91.416,32.713 pad.3@91.846,32.283
  Bottom Layer w1.397: C17.2 97.44,22.358 U1.4 U1.4@101.101,26.01
  Bottom Layer w1.448: R5.1 89.977,44.092 90.966,43.103 C18.2
  Bottom Layer w2.261: v2(40.157,62.001) 40.157,53.721 Q1.3
  Bottom Layer w2.388: C27.2 55.846,43.257 57.087,44.498 61.404,44.498 62.645,43.257 C28.2 73.034,43.257 73.111,43.18 v2(73.152,43.18) ; v2(63.627,69.342) 63.656,69.313 63.656,68.964 66.911,65.709 C24.2 C25.2
  Bottom Layer w2.515: v2(70.104,35.56) 70.109,35.555 71.998,35.555 73.694,33.859 C16.2 ; C19.2 C17.2 ; C18.2 98.875,43.103 98.901,43.129 v2(98.908,43.129)
NetC1_1: C1.1 C2.1 LDM1.3 U1.2 | length 36.5
  Top Layer w1.143: C2.1 C1.1 115.13,41.783 116.578,43.23 117.028,43.23 117.031,43.234 LDM1.3 117.031,27.85 U1.2
NetC15_2: C15.2 pad.3@82.779,33.96 R5.2 R6.1 U2.9 | length 30.7
  Top Layer w0.711: R6.1@80.264,38.608 82.779,36.093 82.779,33.96 82.785,33.953 84.094,33.953 85.701,35.56 v3(85.852,35.56)
  Bottom Layer w0.254: pad.3@82.753,33.985 82.779,33.96 82.906,33.833 83.591,33.833 83.708,33.716 84.329,33.716 U2.9
  Bottom Layer w0.3: C15.2@66.675,33.859 68.165,33.859 70.02,32.004 77.927,32.004 79.578,33.655 81.432,33.655 81.763,33.985 pad.3@82.753,33.985
  Bottom Layer w0.711: R5.2 85.852,37.315 v3(85.852,35.56)
NetC20_2: C20.2 pad.3@89.002,33.325 U2.3 | length 5.2
  Top Layer w0.254: pad.3@89.002,33.325 pad.3@89.179,33.327
  Top Layer w0.6: pad.3@89.179,33.327 90.651,33.349 91.465,34.163 C20.2
  Bottom Layer w0.254: U2.3 88.255,33.213 88.367,33.325 pad.3@89.002,33.325
NetC22_2: C22.2 C23.2 IC1.5 U3.5 VR1.1 XR1.3 | length 42.6
  Top Layer w0.559: C23.2 77.431,46.445 79.172,44.704 81.826,44.704 82.154,45.031 IC1.5 82.17,46.456 82.22,46.406 86.797,46.406 87.097,46.406 C22.2 88.823,46.456 89.63,47.263 VR1.1
  Top Layer w0.6: v1(84.43,50.267) 85.052,49.644 85.052,48.832 86.647,47.236 86.647,46.606 86.797,46.456 C22.2 ; v1(85.471,54.839) 87.071,54.839 90.373,58.141 XR1.3
  Bottom Layer w0.356: v1(84.43,50.267) 84.43,50.317 84.455,50.343 84.43,50.368 84.43,52.381 84.98,52.931 85.138,52.931 U3.5@85.293,53.086 ; v1(85.471,54.839) 85.446,54.864 83.012,54.864 82.804,54.656 82.804,53.34 83.058,53.086 U3.5@85.293,53.086 ; U3.5 U3.5@85.293,53.086
NetC26_2: C26.2 IC2.2 R7.2 | length 6.4
  Bottom Layer w0.559: IC2.2 C26.2
  Bottom Layer w0.8: C26.2 72.39,53.848 R7.2
NetD1_C: D1.C L1.2 | length 23.1
  Top Layer w1.194: D1.C 130.117,63.194 130.665,62.646 130.665,60.039 138.862,51.841 138.862,45.127 138.849,45.115 138.849,44.428 138.846,44.425 L1.2
NetD2_1: D2.1 R2.2 | length 21.6
  Bottom Layer w1.27: D2.1 124.308,53.311 129.119,48.5 R2.2
NetD3_C: D3.C R1.2 | length 6.1
  Top Layer w1.194: D3.C 114.557,68.365 120.583,68.365 R1.2
NetIC2_6: IC2.6 R9.1 | length 10.8
  Bottom Layer w0.559: R9.1 53.719,52.811 55.349,51.181 61.406,51.181 62.676,52.451 IC2.6
NetIC2_7: IC2.7 R8.1 | length 5.8
  Bottom Layer w0.559: R8.1 60.685,52.811 61.595,53.721 IC2.7
NetR4_2: pad.3@79.856,32.839 R4.2 U2.8 | length 14.7
  Top Layer w0.6: R4.2 70.597,32.474 79.491,32.474 pad.3@79.856,32.839
  Bottom Layer w0.254: pad.3@79.731,32.76 80.184,33.213 U2.8
PWM-S1: IC1.2 U3.1 XR1.1 XR1.4 | length 32.2
  Top Layer w0.356: IC1.2 IC1.2@81.236,48.778
  Top Layer w0.5: IC1.2@81.236,48.778 81.236,49.715 82.855,51.333 v1(86.741,51.333)
  Top Layer w1.27: XR1.1 85.191,62.988 85.191,63.548 85.928,64.285 91.635,64.36 92.169,64.36 92.913,63.617 XR1.4
  Bottom Layer w0.356: XR1.1 85.293,57.455 87.782,54.966 U3.1 86.949,53.746 86.741,53.538 v1(86.741,51.333)
PWM-S2: IC1.4 R7.1 U3.6 | length 19.3
  Top Layer w0.356: IC1.4 IC1.4@80.254,46.876
  Top Layer w0.5: v1(78.486,47.498) 79.528,46.456 IC1.4
  Top Layer w0.6: v1(80.899,53.848) v1@83.776,53.848
  Bottom Layer w0.356: v1(83.82,53.848) 83.93,53.848 84.032,53.746 U3.6
  Bottom Layer w0.7: v1(78.486,47.498) 78.486,51.435 v1(80.899,53.848)
  Bottom Layer w0.787: R7.1 v1(80.899,53.848)
Supply+: Csnub1.1 Csnub2.1 Csnub3.1 Csnub4.1 FWD1.1 J2.1 J2.2 J2.3 J2.4 J2.5 J2.6 J2.7 J2.8 J3.1 pad.@13.208,26.289 | length 49.9
  Top Layer w1.778: pad.@13.208,26.289 28.956,10.541 J3.1
  Top Layer w3.81: pad.@13.208,26.289 28.41,26.289 32.878,21.821
Supply-: Csnub1.2 Csnub2.2 Csnub3.2 Csnub4.2 J3.2 J3.3 J3.4 J3.5 M1.2 pad.@13.208,43.18 | length 56.1
  Bottom Layer w2.413: pad.@13.208,43.18 31.947,24.441 J3.2 J3.3 J3.4 J3.5
pads on no net: IC1.1 IC2.3 LDM1.2 LDM1.4 R3.1 R6.3 U1.6 U3.3 U3.4 XR1.5 XR1.8

## Polygon pours and split planes (outlines as drawn)
GND-S on Bottom Layer "Bottom Layer-GND-S" (solid, shelved, pour order 7): 68.174,0.533 68.199,0.508 104.648,0.508 107.772,3.632 107.772,70.333 106.502,71.603 69.647,71.603 69.545,71.501 23.8,71.501 20.803,68.504 20.803,3.734 24.003,0.533
GND-P on Bottom Layer "NONET_L04_P000" (solid, shelved, pour order 0): 141.453,69.621 139.827,71.247 112.116,71.247 110.084,69.215 110.084,2.337 111.43,0.991 139.548,0.991 141.122,2.565
GND-S on Top Layer "Top Layer-GND-S" (solid, shelved, pour order 4): 68.174,0.533 68.199,0.508 104.648,0.508 107.772,3.632 107.772,70.333 106.502,71.603 69.647,71.603 69.545,71.501 24.841,71.501 20.955,67.615 20.955,5.232 25.654,0.533 47.041,0.533
GND-P on Top Layer "NONET_L01_P001" (solid, shelved, pour order 1): 141.453,69.621 139.827,71.247 112.116,71.247 109.042,68.174 109.042,3.378 111.43,0.991 139.548,0.991 141.122,2.565
GND-P on GND-P Layer (split plane): 141.704,0.51 0.51,0.51 0.51,71.626 141.704,71.626
GND-S on GND-S Layer (split plane): 141.704,0.51 0.51,0.51 0.51,71.626 141.704,71.626

## Keep-outs
Keep-Out Layer:
  lines w0.813: 142.215,72.136 142.215,0 0,0 0,72.136 142.291,72.136

## Other copper
Top Layer:
  region net "FWD A": 59.03,27.236 59.69,27.896 59.69,36.068 58.166,37.592 50.143,37.592 ccw(c50.141,36.899) 50.12,37.592 50.057,37.529 48.362,39.225 48.362,47.041 47.777,47.625 44.348,47.625 41.91,45.187 41.91,28.423 43.866,26.467 58.26,26.467
  region net Supply+: 34.188,17.551 58.826,17.551 59.842,18.567 59.842,21.92 58.242,23.52 58.014,23.52 41.199,23.52 38.227,26.492 38.227,32.868 37.821,33.274 13.233,33.274 ccw(c13.233,26.053) 6.012,26.053 ccw(c14.63,26.918) 10.633,19.235 ccw(c16.245,30.023) 16.245,17.862 27.965,17.551
  region net Supply-: 37.565,34.931 14.242,34.931 cw(c14.242,43.071) 6.274,41.41 6.274,43.388 cw(c14.614,43.388) 8.968,49.527 cw(c77.56,-78.117) 29.243,58.496 30.48,58.496 30.785,58.191 30.785,40.792 31.42,40.157 37.033,40.157 38.227,38.964 38.182,35.54
  region net GND-S: 32.41,58.039 38.506,58.039 44.221,52.324 46.379,52.324 46.661,52.207 cw(c46.457,51.714) 46.99,51.714 46.99,50.546 cw(c46.253,50.546) 46.253,49.809 44.425,49.809 37.084,42.469 32.639,42.469 31.928,43.18 31.928,57.556
Bottom Layer:
  region net Supply+: 48.768,14.356 49.862,12.573 58.718,12.573 59.944,13.799 59.944,21.971 58.42,23.495 50.397,23.495 ccw(c50.392,22.897) 50.374,23.495 50.348,23.52 42.596,23.52 42.367,23.292 42.367,20.422 42.926,19.863 48.209,19.863 48.768,19.304

## Silkscreen, mask and mechanical layers (free items; w line width, h text height)
Top Overlay:
  text "VDS_BNC" at 35.158,63.221 h1.27 r90
  text "VGS_BNC" at 53.34,57.073 h1.27
  text "D          S    K     G" at 50.277,44.42 h1.52 r90
  text "Inverter" at 79.756,43.317 h1.02
  text "CM_Choke" at 131.902,38.064 h1.52
  text "FWD1" at 41.885,22.555 h1.27 r90
  text "IALB" at 81.805,12.04 h2.03
  text "Indrajit majumdar" at 78.367,9.419 h1.52
  text "October 2023" at 79.726,7.049 h1.52
  text "DC_Link_BNC" at 28.271,6.731 h1.27 r90
Bottom Overlay:
  text "Gate Driver" at 68.453,56.531 h1.27
  text "Buffer" at 91.313,54.366 h1.02
  text "LDO" at 86.741,30.619 h1.02
  text "DC-DC converter" at 119.888,10.94 h1.27